# Altium PCB altium.pcbdoc
Units mil, origin at the board's own origin, x right, y up, seen from the top; angles counter-clockwise.
Board outline 3912.92 x 3616.36 mil, 2 copper layers (Top Layer, Bottom Layer); 25 components, 65 nets, 135 pads, 0 vias.
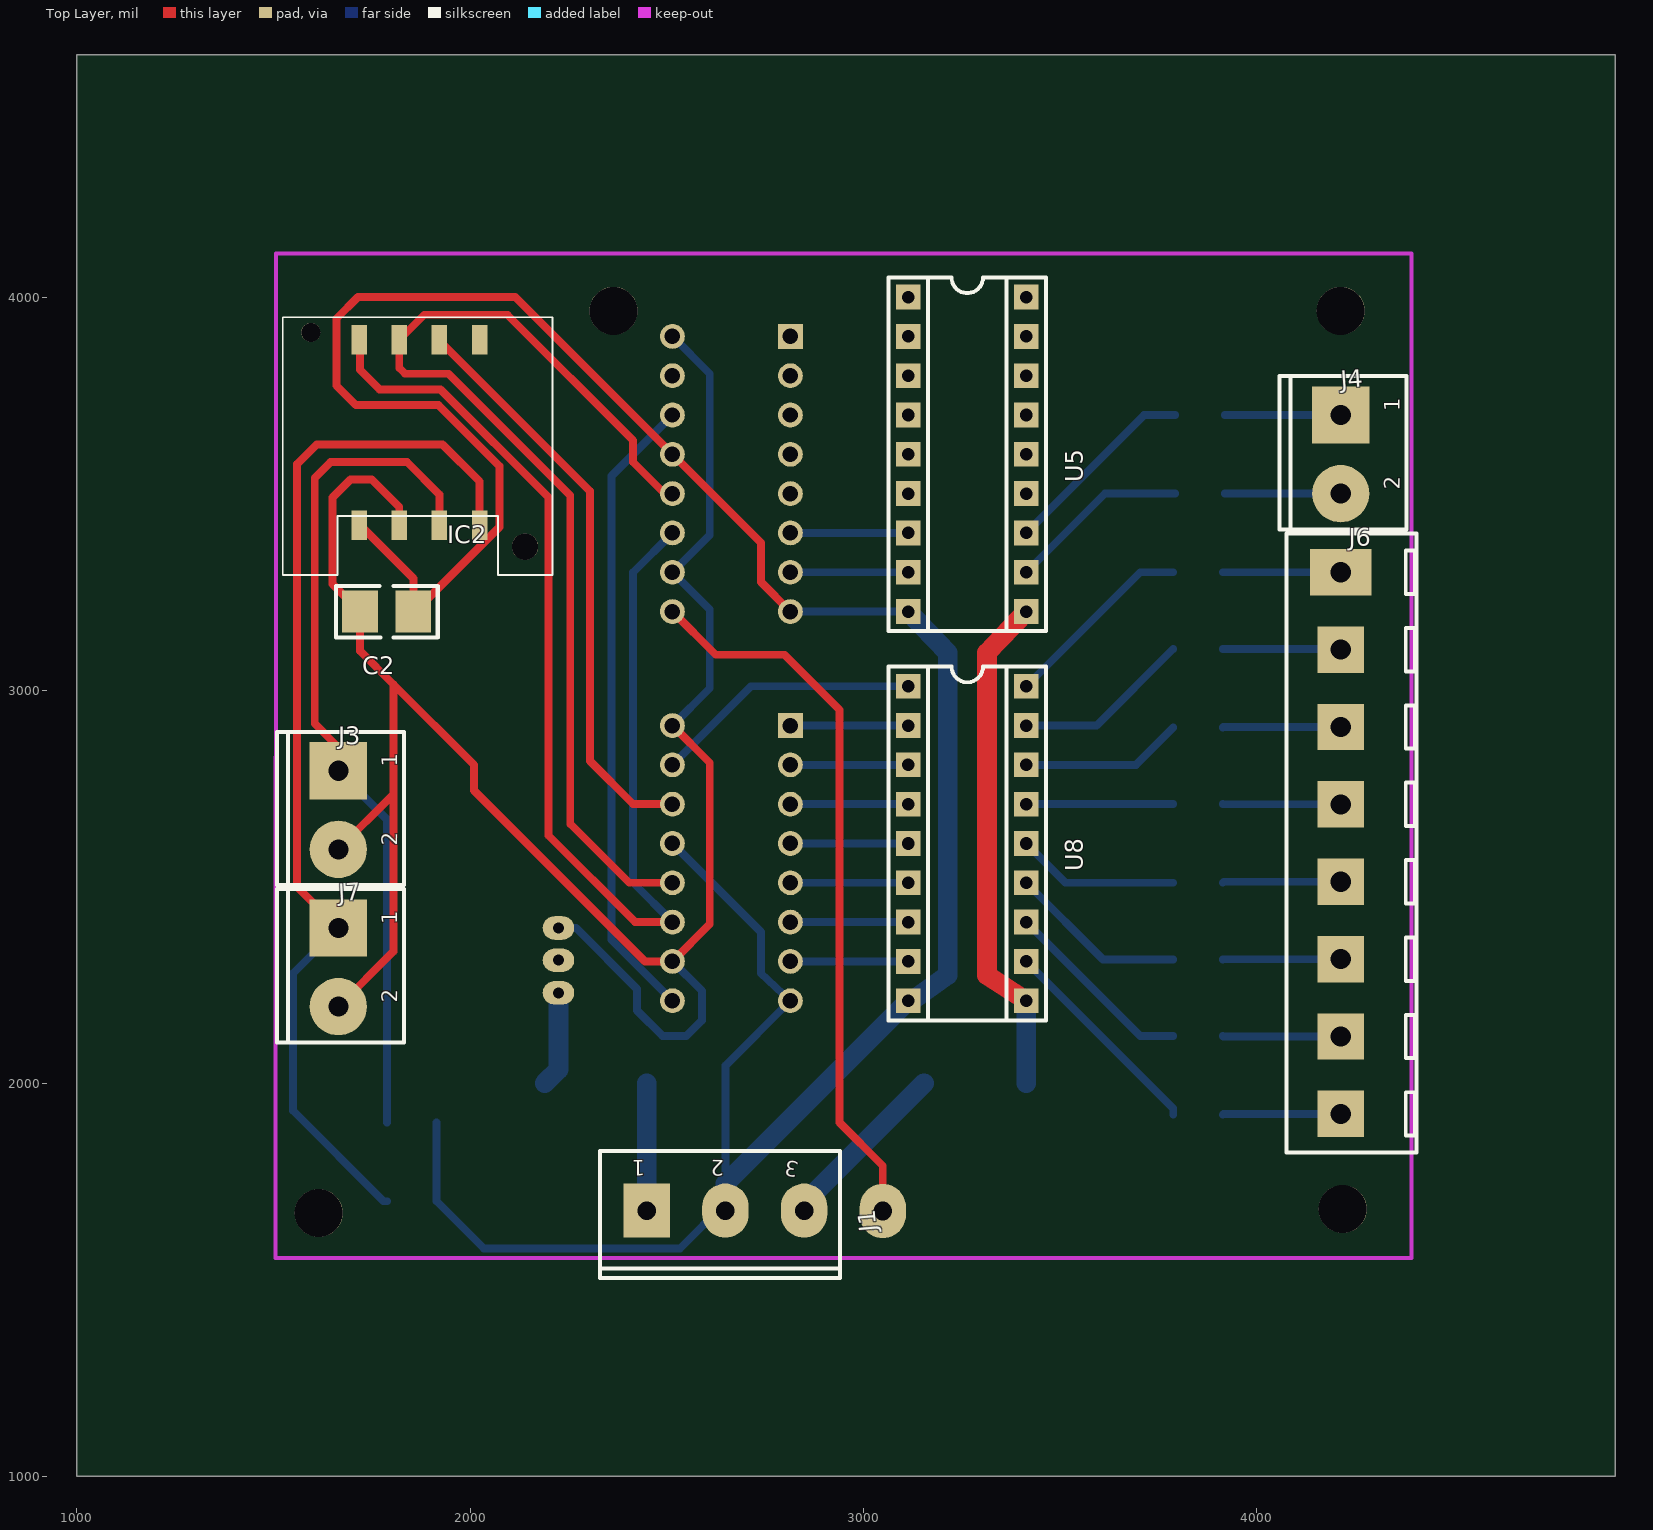
[diagram p0: Top Layer view]
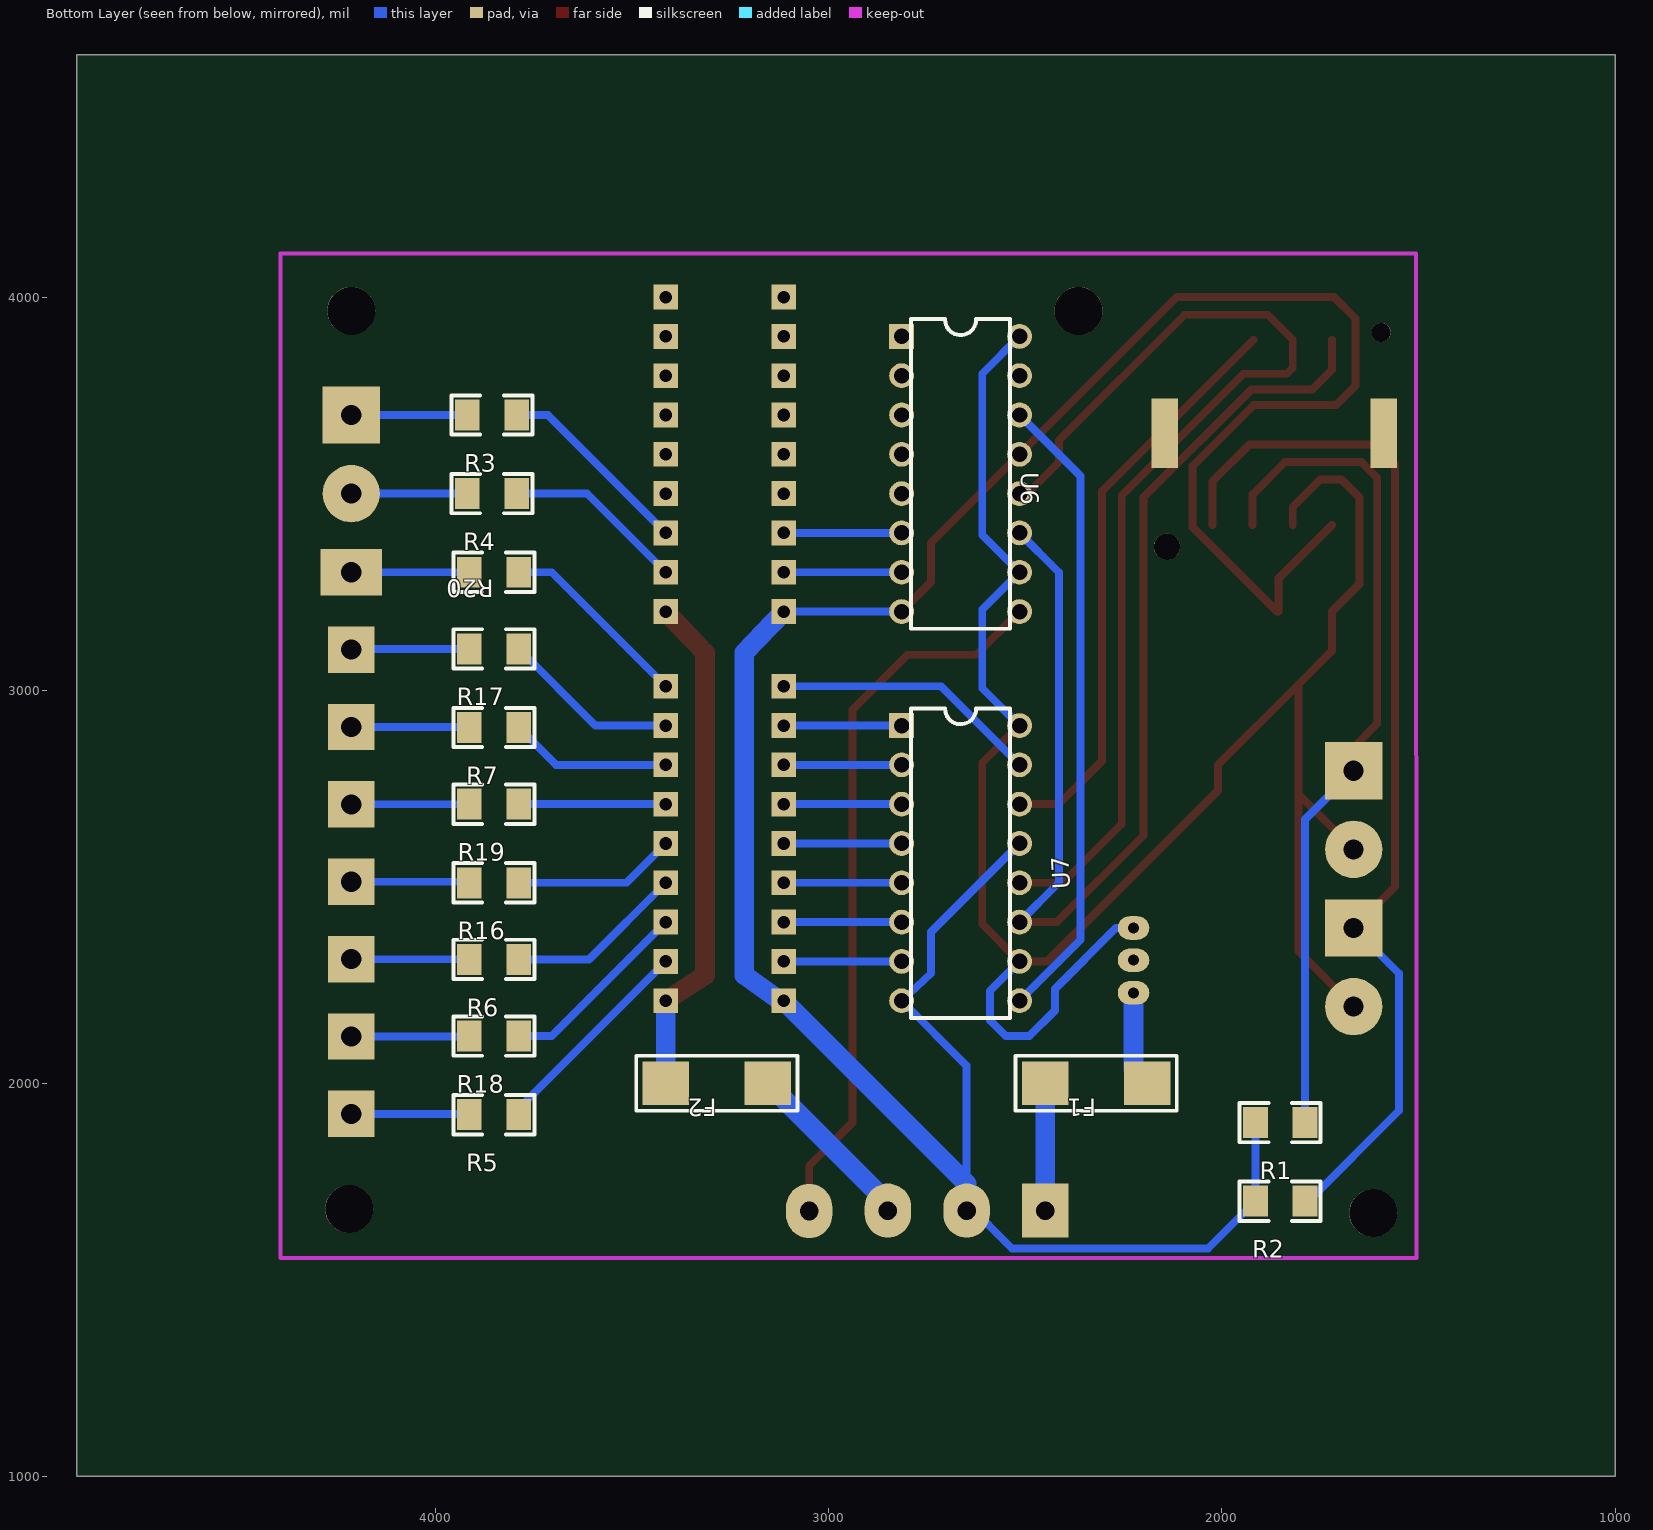
[diagram p1: Bottom Layer view, seen from below]

## Layer stack, top to bottom
Top Layer: signal copper (thickness not stored)
Dielectric: dielectric 12.6, FR-4, Dk 4.8
Bottom Layer: signal copper (thickness not stored)

## Board outline
4912.92,1000 1000,1000 1000,4616.36 4912.92,4616.36

## Components (designator, comment, footprint, x,y, rotation, side; value= is the part's Value field where it differs from the comment)
C2 "100nF" 1210 1788,3200.36 r180 top
F1 "NO" OMF_125#1 2350,2015.36 r180 bottom
F2 "NO" OMF_125#2 2915,1715.36 r180 bottom
IC2 "TR-72D" IQRF_KON-SIM-01 1866.86,3696.03 r180 top
J1 "KF127_3P_5.08" KF127_3P_5.08 2650,1670.36 r270 top
J3 "Fotgjengerovergangknapp 2" KF127_2P_5.08 1655,2705.36 r0 top
J4 "KF127_2P_5.08" KF127_2P_5.08 4205,3610.36 r0 top
J6 "KF127-8P" KF127-8P 4215,2631.07 r0 top
J7 "Fotgjengerovergang knapp 1" KF127_2P_5.08 1655,2305.36 r0 top
R1 "5.1K" 1206 1852.01,1900.36 r180 bottom
R2 "5.1K" 1206 1852.01,1700.36 r180 bottom
R3 "150" 1206 3857.01,3700.36 r180 bottom
R4 "200" 1206 3857.01,3500.36 r180 bottom
R5 "200" 1206 3852.01,1920.36 r180 bottom
R6 "200" 1206 3852.01,2315.36 r180 bottom
R7 "200" 1206 3852.01,2905.36 r180 bottom
R16 "180" 1206 3852.01,2510.36 r180 bottom
R17 "180" 1206 3852.01,3105.36 r180 bottom
R18 "150" 1206 3852.01,2120.36 r180 bottom
R19 "150" 1206 3852.01,2710.36 r180 bottom
R20 "150" 1206 3852.01,3300.36 r180 bottom
U5 "TBD62083APG" DIP-18 3265,3600.36 r270 top
U6 "SN74HC595N" DIP-16_L19.8-W6.5-P2.54-LS7.6-BL 2665,3550.36 r90 bottom
U7 "SN74HC595N" DIP-16_L19.8-W6.5-P2.54-LS7.6-BL 2665,2560.36 r90 bottom
U8 "TBD62083APG" DIP-18 3265,2610.36 r270 top

## Footprints (in the part's own frame and the unit in brackets; to place one, negate y for a bottom-side part, rotate by r counter-clockwise, add the part's x,y. Pads: shape width x height; smd on the part's side, far side on the other; paste and mask are expansions set on the pad)
1206 [mil]
  rect 63x78.74 smd: 1(62.99,0) 2(-62.99,0)
  silkscreen extent -103,-50 103,50
1210 [mil]
  rect 90.55x106.3 smd: 1(-68,0) 2(68,0)
  silkscreen extent -130,-65 129,66
DIP-16_L19.8-W6.5-P2.54-LS7.6-BL [mm]
  rect 1.6x1.6 hole 1: 1(8.89,3.81)
  round 1.6 hole 1: 2(6.35,3.81) 3(3.81,3.81) 4(1.27,3.81) 5(-1.27,3.81) 6(-3.81,3.81) 7(-6.35,3.81) 8(-8.89,3.81) 9(-8.89,-3.81) 10(-6.35,-3.81) 11(-3.81,-3.81) 12(-1.27,-3.81) 13(1.27,-3.81) 14(3.81,-3.81) 15(6.35,-3.81) 16(8.89,-3.81)
  silkscreen extent -10,-3.2 10,3.2
DIP-18 [mil]
  rect 63x63 hole 32: 1(-400,-150) 2(-300,-150) 3(-200,-150) 4(-100,-150) 5(0,-150) 6(100,-150) 7(200,-150) 8(300,-150) 9(400,-150) 10(400,150) 11(300,150) 12(200,150) 13(100,150) 14(0,150) 15(-100,150) 16(-200,150) 17(-300,150) 18(-400,150)
  silkscreen extent -450,-200 450,200
IQRF_KON-SIM-01 [mm]
  rect 1x1.9 smd: 1(-4.002,7.002) 2(-1.401,7.002) 3(1.19,7.002) 4(3.781,7.002) 5(-4.002,-4.969) 6(-1.401,-4.969) 7(1.19,-4.969) 8(3.781,-4.969)
  rect 1.7x4.5 smd far side: 9(-7.08,1.07) 9(7.079,1.07)
  silkscreen extent -8.72,-6.43 8.72,10.22
KF127-8P [mm]
  rect 4x3 hole 1.3: 1(0,17)
  rect 3x3 hole 1.3: 2(0,12) 3(0,7) 4(0,2) 5(0,-3) 6(0,-8) 7(0,-13) 8(0,-18)
  silkscreen extent -3.5,-20.5 4.9,19.5
KF127_2P_5.08 [mil]
  rect 145.67x145.67 hole 51.18: 1(10,90)
  round 145.67 hole 51.18: 2(10,-110)
  silkscreen extent -146,-201 177,189
KF127_3P_5.08 [mm]
  rect 3.5x3 hole 1.2: 1(-0.15,-5.1)
  oval 3.5x3 hole 1.2: 2(-0.154,-0.006) 3(-0.154,5.074)
  silkscreen extent -4,-8.1 4.2,7.4
OMF_125#1 [mm]
  rect 3x2.8 smd: 1(4.064,-0.381) 2(-2.54,-0.381)
  silkscreen extent -4.44,-2.16 5.97,1.4
OMF_125#2 [mm]
  rect 3x2.8 smd: 1(-6.096,7.239) 2(-12.7,7.239)
  silkscreen extent -14.6,5.46 -4.19,9.02

## Free pads (board coordinates)
  oval 80x60 hole 28: 3(2225,2230.36) 3(2225,2313.36) 3(2225,2395.36)
  oval 118.11x137.79 hole 47.24: 3(3050,1675.36)
  round 48 hole 48 unplated: ""(1595,3910.36)
  round 122 hole 122 unplated: ""(1615,1670.36) ""(2365,3965.36) ""(4215,3965.36) ""(4220,1680.36)
  round 67 hole 67 unplated: ""(2140,3365.36)

## Nets (pads, with @x,y where several pads share a name; then routed paths per layer and width w, separated by ;. In a path a pad name is that pad's centre, name@x,y a point inside that pad or via, vN(x,y) a via of type N, cw(c..) or ccw(c..) an arc to the next point about the centre after c; other vN are vias at no path point)
0: pad.3@2225,2313.36
+5V: C2.2 IC2.3 J3.2 J7.2 pad.3@2225,2395.36 U6.10 U6.16 U7.10 U7.16 | length 5453.6
  Top Layer w20: J7.2 1805,2335.36 1805,3015.36 ; J3.2 1805,2734.86 ; IC2.3 1820,3466.16 1750,3536.16 1695.8,3536.16 1650,3490.36 1650,3270.36 C2.2 1720,3100.36 1805,3015.36 ; U7.16 2610,2815.36 2610,2405.36 U7.10 2445,2310.36 2010,2745.36 2010,2810.36 1805,3015.36
  Bottom Layer w20: pad.3@2225,2395.36 2270,2395.36 2425,2240.36 2425,2185.36 2490,2120.36 2550,2120.36 2590,2160.36 2590,2235.36 U7.10 ; U7.16 2610,3005.36 2610,3205.36 U6.10 2610,3395.36 2610,3805.36 U6.16
+12V: F2.2 U5.10 U8.10 | length 1294.3
  Top Layer w50: U8.10 3315,2275.36 3315,3095.36 U5.10
  Bottom Layer w50: F2.2 U8.10
C1/BTN1/LEFT: IC2.1 J7.1 R2.1 | length 2705.2
  Top Layer w20: J7.1 1560,2500.36 1560,3575.36 1610,3625.36 1930,3625.36 2024.4,3530.96 IC2.1
  Bottom Layer w20: J7.1 1550,2280.36 1550,1930.36 1780,1700.36 R2.1
C2/BTN2/RIGHT: IC2.2 J3.1 R1.1 | length 2161.8
  Top Layer w20: J3.1 1665,2855.36 1605,2915.36 1605,3540.36 1645,3580.36 1840,3580.36 1922,3498.36 IC2.2
  Bottom Layer w20: J3.1 1789.02,2671.34 R1.1
C6/DATA: IC2.6 U7.14 | length 1486.3
  Top Layer w20: IC2.6@1920,3891.66 2305,3506.66 2305,2820.36 2415,2710.36 U7.14
C7/STROBE: IC2.7 U6.12 U7.12 | length 2740.1
  Top Layer w20: U7.12 2405,2510.36 2255,2660.36 2255,3495.36 1945,3805.36 1835,3805.36 1820,3820.36 IC2.7 1883.7,3955.36 2095,3955.36 2415,3635.36 2415,3580.36 2495,3500.36 U6.12
C8/CLK: IC2.8 U6.11 U7.11 | length 3029.9
  Top Layer w20: IC2.8@1720,3891.66 1720,3815.36 1770,3765.36 1925,3765.36 2200,3490.36 2200,2630.36 2420,2410.36 U7.11
  Bottom Layer w20: U7.11 2415,2510.36 2415,3300.36 U6.11
F1_1: F1.1 pad.3@2225,2230.36 | length 244.5
  Bottom Layer w50: F1.1 2225,2035.36 pad.3@2225,2230.36
F1_2: F1.2 J1.1 | length 324.4
  Bottom Layer w50: J1.1 2449.21,1999.57 F1.2
F2_1: F2.1 J1.3 | length 450.4
  Bottom Layer w50: J1.3 2849.77,1695.12 F2.1
FHGREEN: J6.7 R18.2 | length 300.5
  Bottom Layer w20: R18.2 3916.1,2119.26 J6.7
FHRED: J6.8 R5.2 | length 300.8
  Bottom Layer w20: R5.2 3917.05,1922.41 J6.8
FVGREEN: J4.1 R3.2 | length 295
  Bottom Layer w20: R3.2 J4.1
FVRED: J4.2 R4.2 | length 295
  Bottom Layer w20: R4.2 J4.2
GND: C2.1 IC2.4 J1.2 R1.2 R2.2 U5.9 U6.8 U6.13 U7.8 U7.13 U8.9 | length 7269.2
  Top Layer w20: IC2.4@1720,3420.36 1856,3284.36 C2.1 1860,3200.36 2075,3415.36 2075,3570.36 1920,3725.36 1710,3725.36 1660,3775.36 1660,3945.36 1715,4000.36 2115,4000.36 U6.13 2740,3375.36 2740,3275.36 U6.8
  Bottom Layer w20: R1.2 R2.2 2035,1580.36 2534.5,1580.36 2649.8,1695.56 J1.2@2649.8,1676.46 ; U7.13 2740,2385.36 2740,2280.36 U7.8 2649.77,2045.12 J1.2 ; U6.8 U5.9
  Bottom Layer w50: J1.2 2649.77,1745.12 U8.9 3125,2210.36 3215,2275.36 3215,3095.36 U5.9
O1: U7.15 U8.1 | length 682.8
  Bottom Layer w20: U7.15 2715,3010.36 U8.1
O2: U7.1 U8.2 | length 300
  Bottom Layer w20: U7.1 U8.2
O3: U7.2 U8.3 | length 300
  Bottom Layer w20: U7.2 U8.3
O4: U7.3 U8.4 | length 300
  Bottom Layer w20: U7.3 U8.4
O5: U7.4 U8.5 | length 300
  Bottom Layer w20: U7.4 U8.5
O6: U7.5 U8.6 | length 300
  Bottom Layer w20: U7.5 U8.6
O7: U7.6 U8.7 | length 300
  Bottom Layer w20: U7.6 U8.7
O8: U7.7 U8.8 | length 300
  Bottom Layer w20: U7.7 U8.8
O9: U5.7 U6.6 | length 300
  Bottom Layer w20: U6.6 U5.7
O10: U5.8 U6.7 | length 300
  Bottom Layer w20: U6.7 U5.8
QH: U6.14 U7.9 | length 1618.4
  Bottom Layer w20: U7.9 2360,2365.36 2360,3545.36 U6.14
R2_1: IC2.5
RFGREEN: J6.1 R20.2 | length 300
  Bottom Layer w20: R20.2 J6.1
RFRED: J6.3 R7.2 | length 300.5
  Bottom Layer w20: R7.2 3916.3,2906.66 J6.3
RFYELLOW: J6.2 R17.2 | length 300.8
  Bottom Layer w20: R17.2 4213.15,3105.36 J6.2
S$22: 
S$71: 
U5_1: U5.1
U5_2: U5.2
U5_3: U5.3
U5_4: U5.4
U5_5: U5.5
U5_6: U5.6
U5_11: R4.1 U5.11 | length 461.9
  Bottom Layer w20: U5.11 3615,3500.36 R4.1
U5_12: R3.1 U5.12 | length 503.3
  Bottom Layer w20: U5.12 3715,3700.36 R3.1
U5_13: U5.13
U5_14: U5.14
U5_15: U5.15
U5_16: U5.16
U5_17: U5.17
U5_18: U5.18
U6_1: U6.1
U6_2: U6.2
U6_3: U6.3
U6_4: U6.4
U6_5: U6.5
U6_9: pad.3@3050,1675.36 U6.9 | length 1849.1
  Top Layer w20: U6.9 2625,3090.36 2800,3090.36 2940,2950.36 2940,1900.36 3050,1790.36 pad.3@3050,1675.36
U6_15: U6.15
U8_11: R5.1 U8.11 | length 544.9
  Bottom Layer w20: U8.11 3789.02,1936.34 R5.1
U8_12: R18.1 U8.12 | length 494.1
  Bottom Layer w20: U8.12 3705,2120.36 R18.1
U8_13: R6.1 U8.13 | length 454.8
  Bottom Layer w20: U8.13 3610,2315.36 R6.1
U8_14: R16.1 U8.14 | length 415.4
  Bottom Layer w20: U8.14 3515,2510.36 R16.1
U8_15: R19.1 U8.15 | length 374
  Bottom Layer w20: U8.15 R19.1
U8_16: R7.1 U8.16 | length 413.4
  Bottom Layer w20: U8.16 3694.02,2810.36 R7.1
U8_17: R17.1 U8.17 | length 454.8
  Bottom Layer w20: U8.17 3594.02,2910.36 R17.1
U8_18: R20.1 U8.18 | length 494.1
  Bottom Layer w20: U8.18 3705,3300.36 R20.1
VGREEN: J6.4 R19.2 | length 300
  Bottom Layer w20: R19.2 J6.4
VRED: J6.6 R6.2 | length 300
  Bottom Layer w20: R6.2 J6.6
VYELLOW: J6.5 R16.2 | length 301.1
  Bottom Layer w20: R16.2 3917.6,2512.96 J6.5
pads on no net: IC2.9

## Text inside footprints (layer, text, board x,y; h text height)
J1: Top Overlay "1" at 2445.27,1804.21 h39.37 r180; Top Overlay "2" at 2646.4,1804.21 h39.37 r179; Top Overlay "3" at 2838.79,1799.91 h39.37 r169
J3: Top Overlay "1" at 1814.68,2805.36 h39.37 r90; Top Overlay "2" at 1814.68,2605.01 h39.37 r89
J4: Top Overlay "1" at 4364.69,3710.36 h39.37 r90; Top Overlay "2" at 4364.68,3510.01 h39.37 r89
J7: Top Overlay "1" at 1814.68,2405.36 h39.37 r90; Top Overlay "2" at 1814.68,2205.01 h39.37 r89